# Altium PCB MCU_Board.PcbDoc (part 1 of 2)
Units mil, origin at the board's own origin, x right, y up, seen from the top; angles counter-clockwise.
Board outline 5411.85 x 3910 mil, 4 copper layers (Top Layer, Second Layer, Third Layer, Fouth Layer), stack 59.526 mil thick; 116 components, 143 nets, 703 pads, 913 vias.
Unrouted connection lines stored in the file: 4.
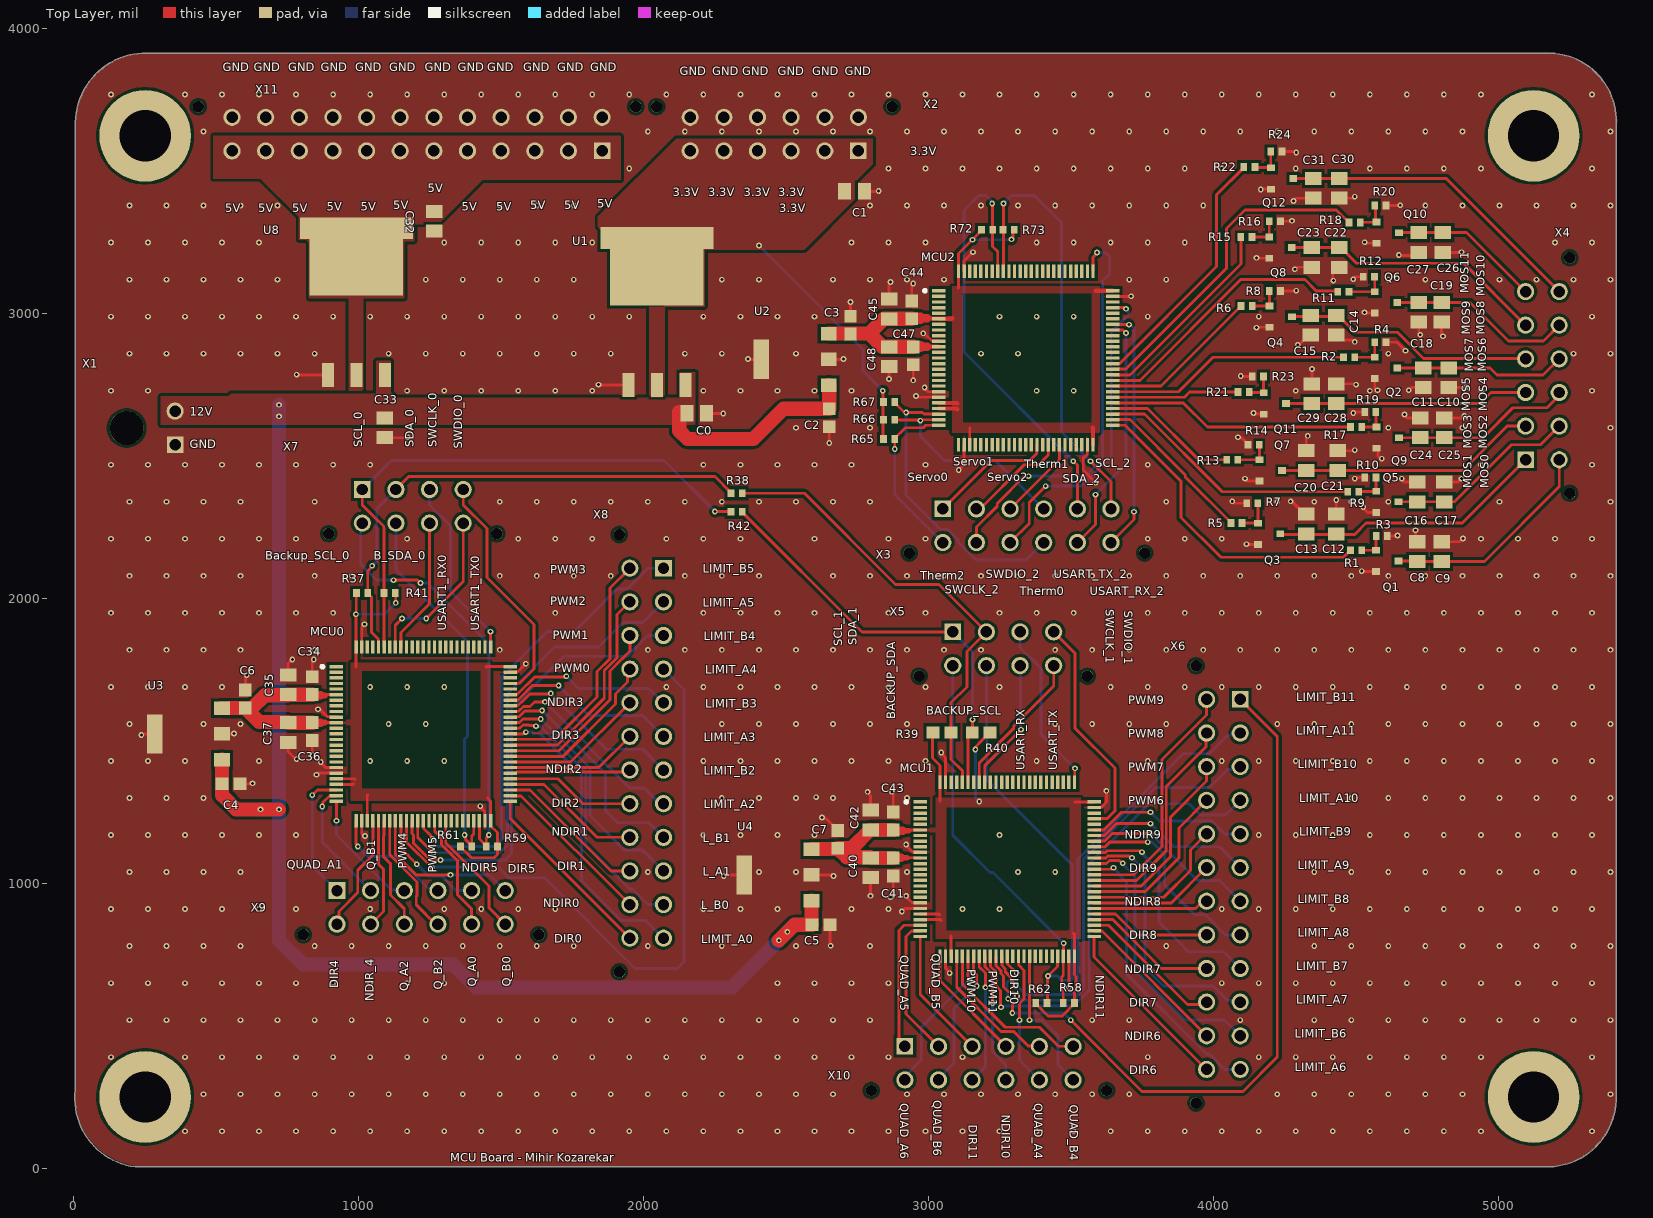
[diagram p0: Top Layer view]
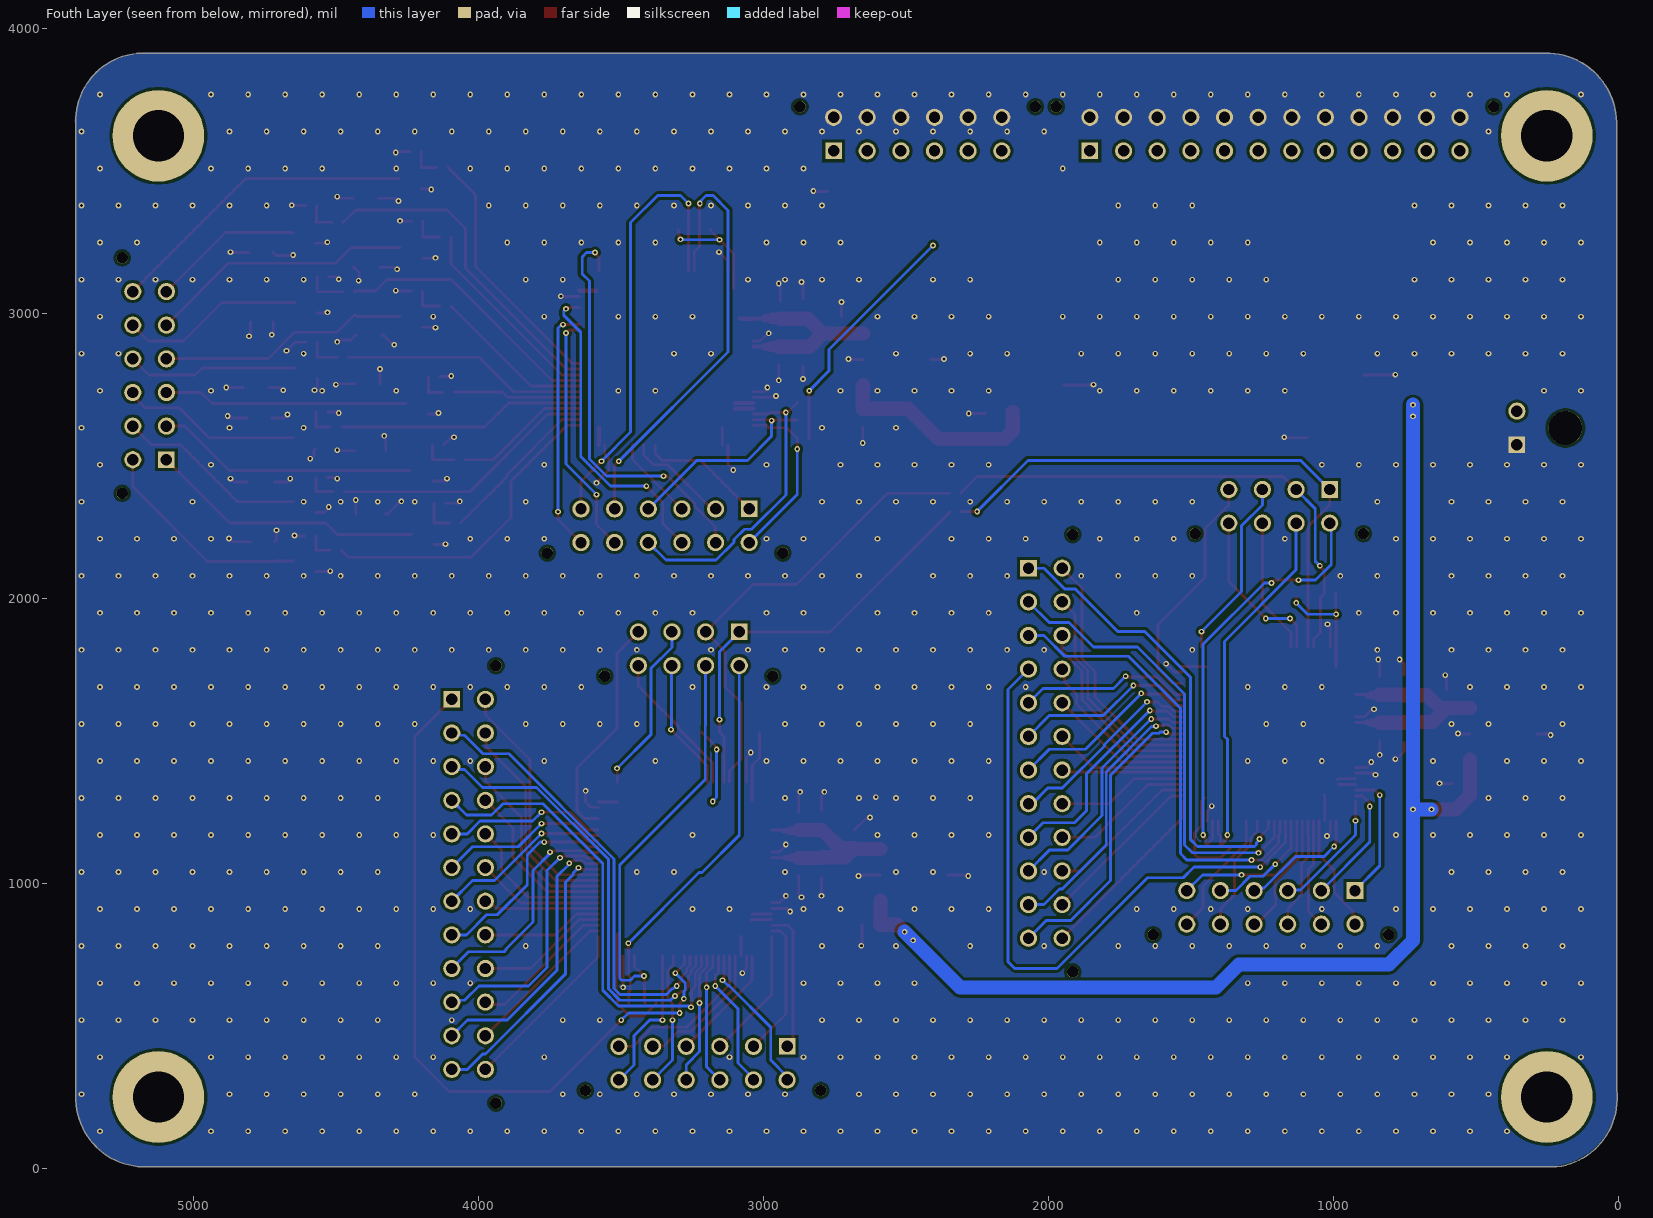
[diagram p1: Fouth Layer view, seen from below]
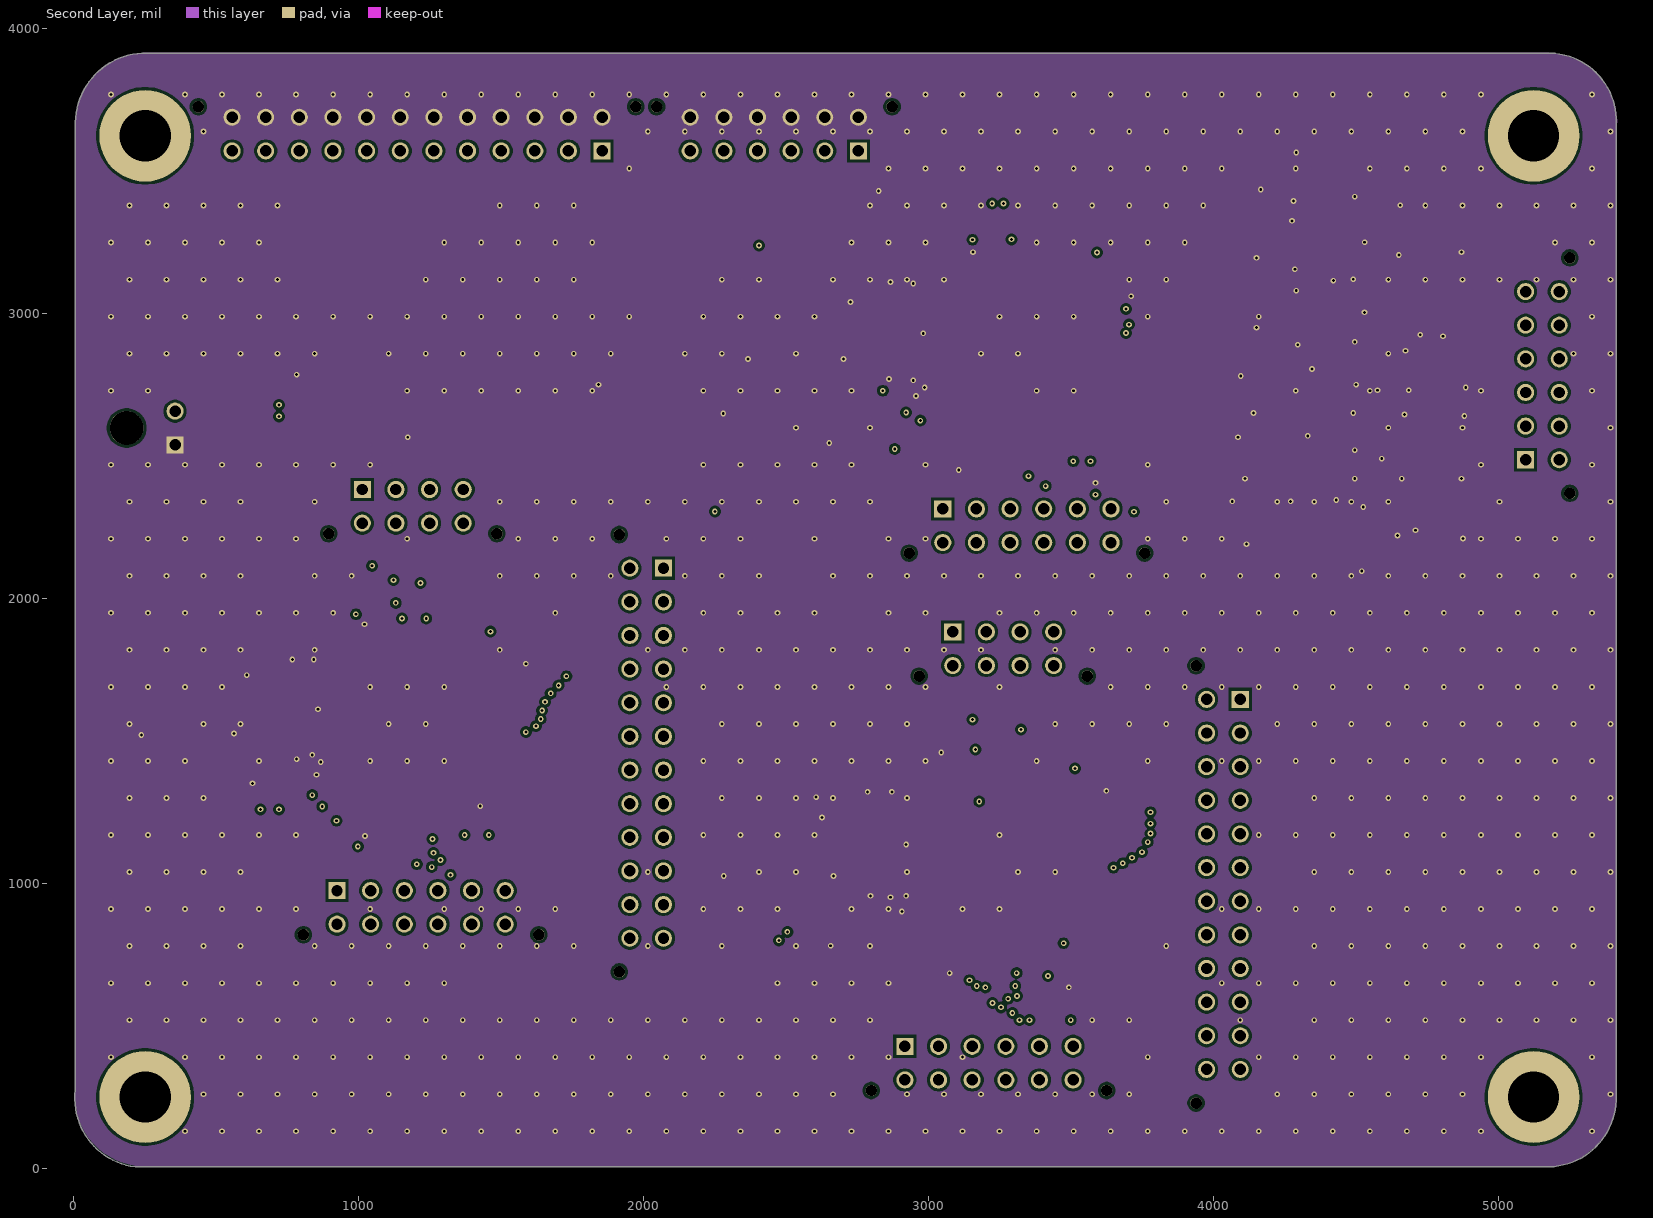
[diagram p2: Second Layer]
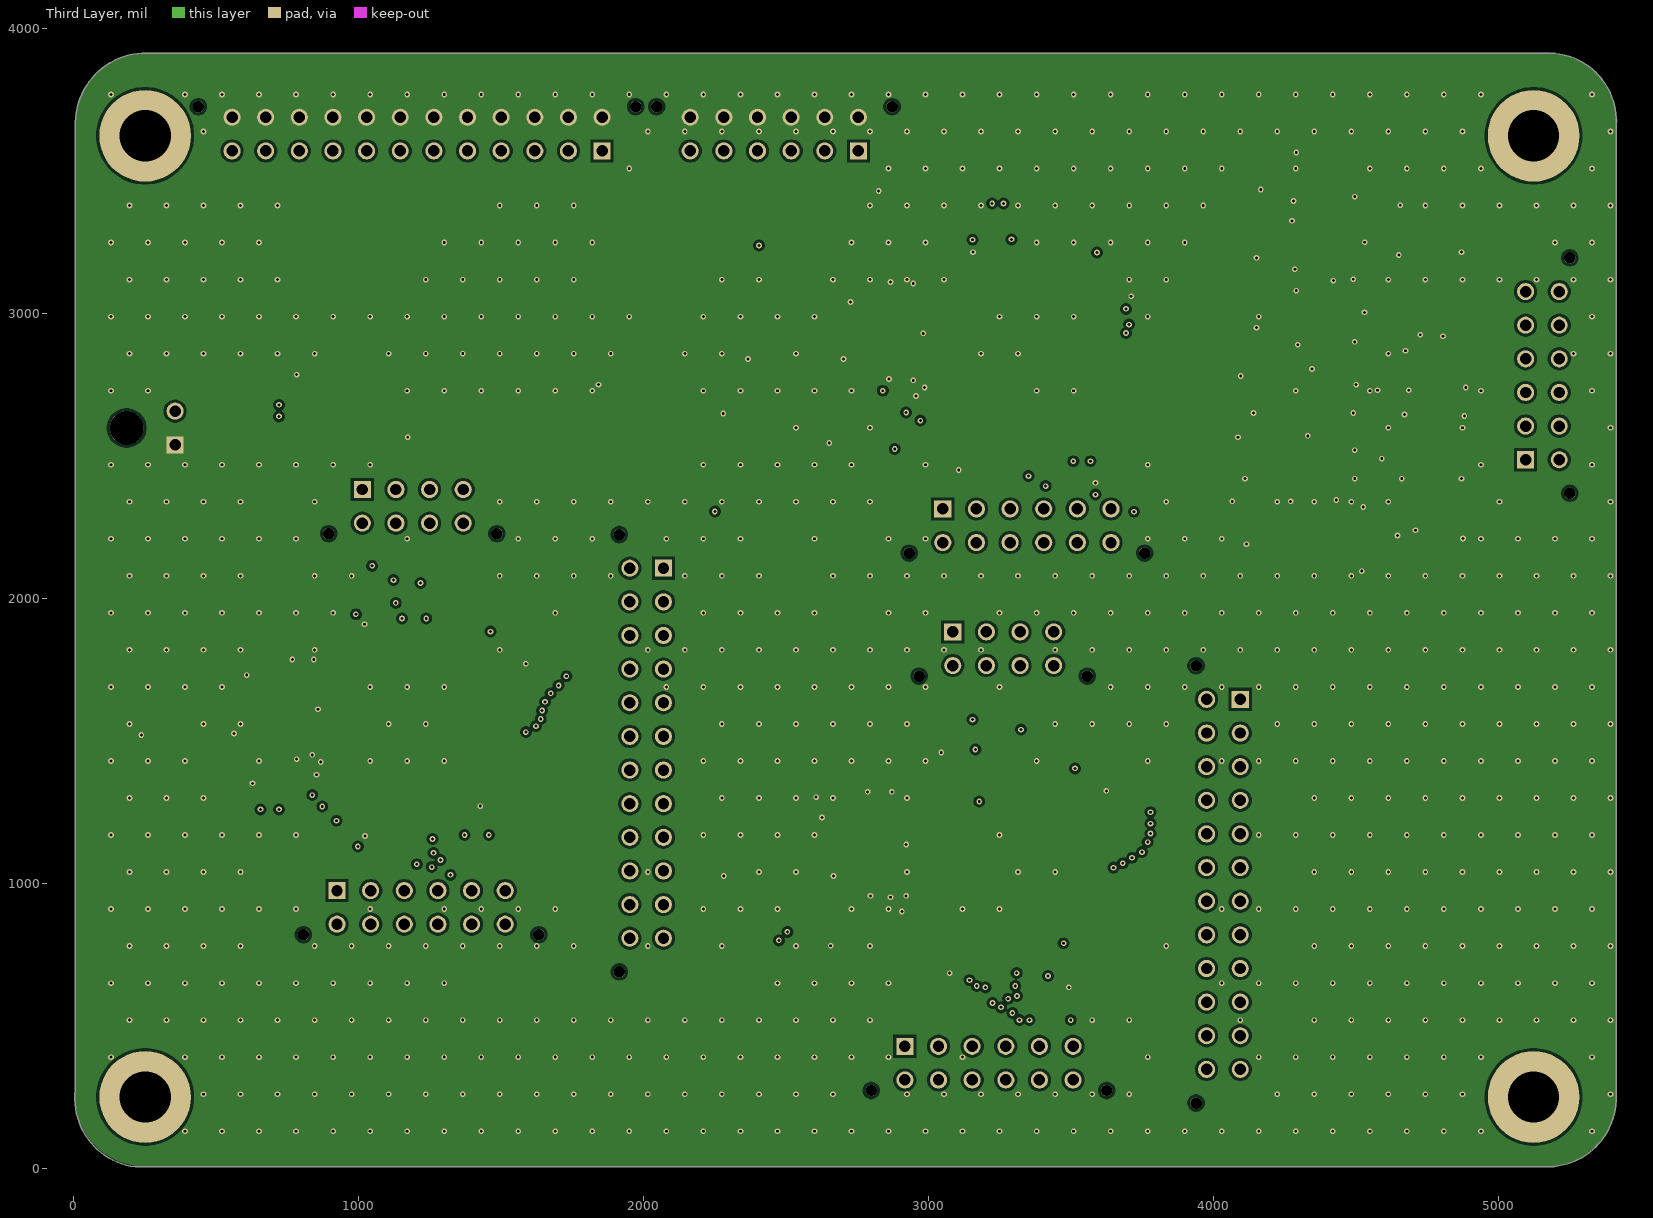
[diagram p3: Third Layer]
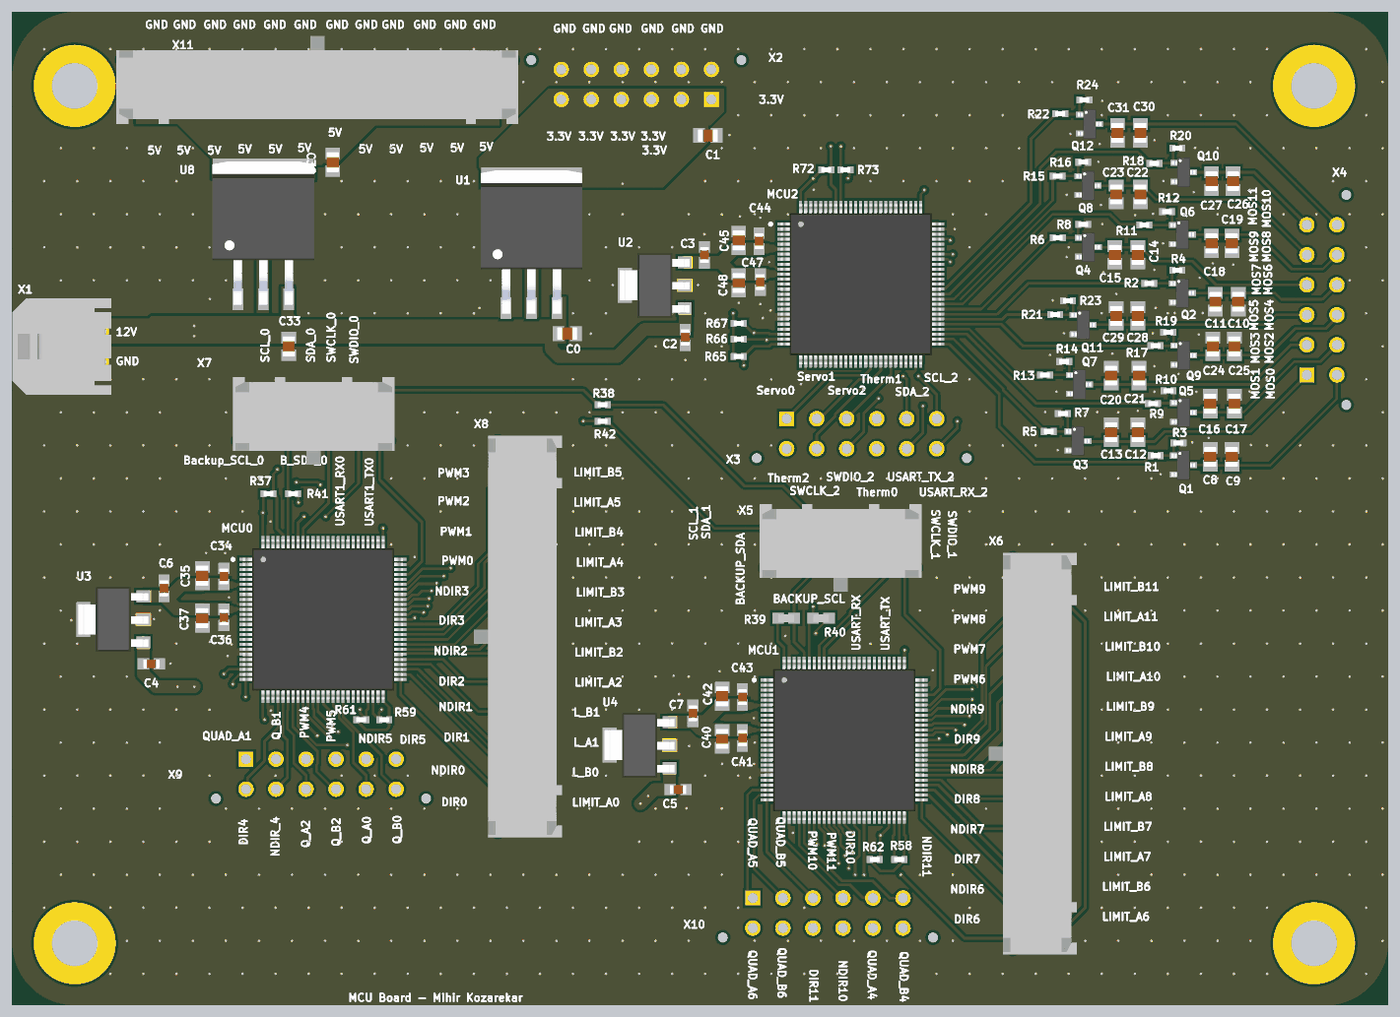
[diagram p5: 3D render of the assembled board from above, using the file's embedded part models]

## Layer stack, top to bottom
Top Solder: solder mask 0.4, Solder Resist, Dk 3.5
Top Layer: signal copper 1.4
Dielectric 2: prepreg 7.3, PP-006, Dk 4.1
Second Layer: signal copper 1.378
Dielectric 1: core 39.37, Core-009, Dk 4.5
Third Layer: signal copper 1.378
Dielectric 3: prepreg 7.3, PP-006, Dk 4.1
Fouth Layer: signal copper 1.4
Bottom Solder: solder mask 0.4, Solder Resist, Dk 3.5

## Board outline
215,5 cw(c245,245) 5,275 5,3655 cw(c252.5,3667.5) 240,3915 5185,3915 cw(c5177.5,3677.5) 5415,3670 5415,3675 5415,255 cw(c5172.5,247.5) 5180,5

## Design rules (kind name [scope] priority, off if disabled: settings)
Clearance [All] p1: gap=10 ignorepadtopadclearanceinfootprint=FALSE except(0: Arc-Hole Track-Hole SMDPad-Hole THPad-Hole Via-Hole Fill-Hole Poly-Hole Region-Hole Text-Hole; 5: Arc-Arc Arc-Track Arc-SMDPad Track-Track Track-SMDPad SMDPad-SMDPad)
HoleSize [All] p1: absolutevalues=TRUE maxlimit=200 minlimit=1 maxpercent=80.000 minpercent=20.000
PlaneClearance [All] p1: clearance=5
PolygonConnect PolygonConnect_1 [All] p1: connectstyle=Direct reliefconductorwidth=10 reliefentries=4 polygonreliefangle="90 Angle" airgapwidth=10
RoutingVias [All] p1: holewidth=28 width=50 viastyle="Through Hole" minholewidth=28 minwidth=50 maxholewidth=28 maxwidth=50
SolderMaskExpansion [IsVia] p1: expansion=4 istentingtop=TRUE
Width [All] p1: maxlimit=100 minlimit=10 preferedwidth=10 midlayer1_maxwidth=10 midlayer2_maxwidth=10 minimp=50.000000 maximp=50.000000 favimp=50.000000
28 further rules are at their usual default settings.

## Classes and differential pairs
component class Voltage_Rails: C0 C1 C2 C3 C4 C5 C6 C7 C32 C33 U1 U2 U3 U4 U8
component class 6_Power_Fuse_MCU: C44 C45 C47 C48 MCU2 R65 R66 R67 R72 R73
component class 5_Motors_MCU: C34 C35 C36 C37 C40 C41 C42 C43 MCU0 MCU1 R37 R38 R39 R40 R41 R42 R58 R59 R61 R62
component class 4_Mosfet: 30 C8 C9 C10 C11 C12 C13 C14 C15 C16 C17 C18 C19 C20 C21 C22 C23 C24 C25 C26 C27 C28 C29 C30 C31 Q1 Q2 Q3 Q4 Q5 Q6 Q7 Q8 Q9 Q10 Q11 Q12 R1 R2 R3 R4 R5 R6 R7 R8 R9 R10 R11 R12 R13 R14 R15 R16 R17 R18 R19 R20 R21 R22 R23 R24 X4
component class 1_Headers: X1 X2 X3 X5 X6 X7 X8 X9 X10 X11

## Components (designator, comment, footprint, x,y, rotation, side; value= is the part's Value field where it differs from the comment)
C0 "CL21A106KOQNNNE" CAP-0805 2187.17,2650 r0 top
C1 "CL21A106KOQNNNE" CAP-0805 2740.35,3430 r0 top
C2 "UMK107AB7105KA-T" CAP-0603 2651.81,2635 r270 top
C3 "CC0603KRX7R0BB104" CAP-0603 2726.81,2960 r90 top
C4 "UMK107AB7105KA-T" CAP-0603 551.81,1350 r0 top
C5 "UMK107AB7105KA-T" CAP-0603 2623.31,855 r0 top
C6 "CC0603KRX7R0BB104" CAP-0603 601.81,1647.05 r90 top
C7 "CC0603KRX7R0BB104" CAP-0603 2681.81,1155 r90 top
C8 "CL21A106KOQNNNE" CAP-0805 4716.81,2165 r90 top
C9 "CL21A106KOQNNNE" CAP-0805 4801.81,2165 r90 top
C10 "CL21A106KOQNNNE" CAP-0805 4826.81,2775.35 r270 top
C11 "CL21A106KOQNNNE" CAP-0805 4736.81,2775.35 r270 top
C12 "CL21A106KOQNNNE" CAP-0805 4431.81,2262.05 r90 top
C13 "CL21A106KOQNNNE" CAP-0805 4326.81,2262.05 r90 top
C14 "CL21A106KOQNNNE" CAP-0805 4431.81,2960 r270 top
C15 "CL21A106KOQNNNE" CAP-0805 4341.81,2960 r270 top
C16 "CL21A106KOQNNNE" CAP-0805 4716.81,2374.65 r90 top
C17 "CL21A106KOQNNNE" CAP-0805 4811.81,2374.65 r90 top
C18 "CL21A106KOQNNNE" CAP-0805 4721.81,3005.35 r270 top
C19 "CL21A106KOQNNNE" CAP-0805 4801.81,3005.35 r270 top
C20 "CL21A106KOQNNNE" CAP-0805 4326.81,2484.65 r90 top
C21 "CL21A106KOQNNNE" CAP-0805 4436.81,2484.65 r90 top
C22 "CL21A106KOQNNNE" CAP-0805 4441.81,3197.95 r270 top
C23 "CL21A106KOQNNNE" CAP-0805 4346.81,3197.95 r270 top
C24 "CL21A106KOQNNNE" CAP-0805 4726.81,2599.65 r90 top
C25 "CL21A106KOQNNNE" CAP-0805 4811.81,2599.65 r90 top
C26 "CL21A106KOQNNNE" CAP-0805 4806.81,3250 r270 top
C27 "CL21A106KOQNNNE" CAP-0805 4721.81,3250 r270 top
C28 "CL21A106KOQNNNE" CAP-0805 4431.81,2719.65 r90 top
C29 "CL21A106KOQNNNE" CAP-0805 4346.81,2719.65 r90 top
C30 "CL21A106KOQNNNE" CAP-0805 4441.81,3440.35 r270 top
C31 "CL21A106KOQNNNE" CAP-0805 4351.81,3440.35 r270 top
C32 "CL21A106KOQNNNE" CAP-0805 1265,3324.65 r270 top
C33 "CL21A106KOQNNNE" CAP-0805 1091.81,2599.65 r270 top
C34 "CC0603KRX7R0BB103" CAP-0603 836.81,1694.29 r90 top
C35 "GCM21BR71H105KA03L" CAP-0805 751.81,1697.44 r90 top
C36 "CC0603KRX7R0BB103" CAP-0603 836.81,1532.87 r270 top
C37 "GCM21BR71H105KA03L" CAP-0805 751.81,1530 r270 top
C40 "GCM21BR71H105KA03L" CAP-0805 2796.81,1054.72 r270 top
C41 "CC0603KRX7R0BB103" CAP-0603 2876.81,1057.87 r270 top
C42 "GCM21BR71H105KA03L" CAP-0805 2796.81,1222.44 r90 top
C43 "CC0603KRX7R0BB103" CAP-0603 2876.81,1219.29 r90 top
C44 "CC0603KRX7R0BB103" CAP-0603 2941.81,3013.98 r90 top
C45 "GCM21BR71H105KA03L" CAP-0805 2861.81,3017.13 r90 top
C47 "CC0603KRX7R0BB103" CAP-0603 2946.81,2852.56 r270 top
C48 "GCM21BR71H105KA03L" CAP-0805 2861.81,2849.41 r270 top
MCU0 "STM32F100VBT7B" IC-STM32F100-0001 1226.81,1525 r270 top
MCU1 "STM32F100VBT7B" IC-STM32F100-0001 3276.81,1050 r270 top
MCU2 "STM32F100VBT7B" IC-STM32F100-0001 3341.93,2844.68 r270 top
Q1 "SSM3K341R,LF" NMOS-SOT23-3 4611.18,2132.4 r270 top
Q2 "SSM3K341R,LF" NMOS-SOT23-3 4606.81,2810 r270 top
Q3 "SSM3K341R,LF" NMOS-SOT23-3 4196.18,2227.4 r270 top
Q4 "SSM3K341R,LF" NMOS-SOT23-3 4236.81,2990 r270 top
Q5 "SSM3K341R,LF" NMOS-SOT23-3 4611.81,2340 r270 top
Q6 "SSM3K341R,LF" NMOS-SOT23-3 4606.81,3040 r270 top
Q7 "SSM3K341R,LF" NMOS-SOT23-3 4201.81,2450 r270 top
Q8 "SSM3K341R,LF" NMOS-SOT23-3 4236.18,3232.6 r270 top
Q9 "SSM3K341R,LF" NMOS-SOT23-3 4612.44,2565 r270 top
Q10 "SSM3K341R,LF" NMOS-SOT23-3 4612.44,3285 r270 top
Q11 "SSM3K341R,LF" NMOS-SOT23-3 4216.81,2685 r270 top
Q12 "SSM3K341R,LF" NMOS-SOT23-3 4241.81,3475 r270 top
R1 "ERJ2RKF33R0X" RES-0402 4501.81,2170 r0 top
R2 "ERJ2RKF33R0X" RES-0402 4477.13,2847.4 r0 top
R3 "ERJ2GEJ103X" RES-0402 4591.81,2220 r0 top
R4 "ERJ2GEJ103X" RES-0402 4586.81,2900 r0 top
R5 "ERJ2RKF33R0X" RES-0402 4081.81,2265 r0 top
R6 "ERJ2RKF33R0X" RES-0402 4117.13,3027.4 r0 top
R7 "ERJ2GEJ103X" RES-0402 4137.13,2335 r180 top
R8 "ERJ2GEJ103X" RES-0402 4216.81,3080 r0 top
R9 "ERJ2RKF33R0X" RES-0402 4491.81,2375 r0 top
R10 "ERJ2GEJ103X" RES-0402 4552.13,2425 r180 top
R11 "ERJ2RKF33R0X" RES-0402 4457.13,3077.4 r0 top
R12 "ERJ2GEJ103X" RES-0402 4546.81,3130 r180 top
R13 "ERJ2RKF33R0X" RES-0402 4066.81,2487.4 r0 top
R14 "ERJ2GEJ103X" RES-0402 4142.13,2540 r180 top
R15 "ERJ2RKF33R0X" RES-0402 4116.81,3270 r0 top
R16 "ERJ2GEJ103X" RES-0402 4216.81,3325 r0 top
R17 "ERJ2RKF33R0X" RES-0402 4501.5,2602.4 r0 top
R18 "ERJ2RKF33R0X" RES-0402 4496.81,3320 r0 top
R19 "ERJ2GEJ103X" RES-0402 4551.5,2655 r180 top
R20 "ERJ2GEJ103X" RES-0402 4586.81,3380 r0 top
R21 "ERJ2RKF33R0X" RES-0402 4106.81,2725 r0 top
R22 "ERJ2RKF33R0X" RES-0402 4126.81,3515 r0 top
R23 "ERJ2GEJ103X" RES-0402 4156.81,2780 r180 top
R24 "ERJ2GEJ103X" RES-0402 4221.81,3570 r0 top
R37 "RC0402FR-7W4K7L" RES-0402 1011.81,2020 r0 top
R38 "RC0402FR-070RL" RES-0402 2326.81,2370 r0 top
R39 "AF0603FR-074K7L" RES-0603 3048.31,1530 r0 top
R40 "AF0603FR-074K7L" RES-0603 3185.51,1530 r0 top
R41 "RC0402FR-7W4K7L" RES-0402 1108.7,2020 r180 top
R42 "RC0402FR-070RL" RES-0402 2326.81,2305 r0 top
R58 "RC0402FR-7W4K7L" RES-0402 3493.35,580 r0 top
R59 "RC0402FR-7W4K7L" RES-0402 1467.13,1130 r0 top
R61 "RC0402FR-7W4K7L" RES-0402 1377.13,1130 r0 top
R62 "RC0402FR-7W4K7L" RES-0402 3396.81,580 r0 top
R65 "ERJ2GEJ103X" RES-0402 2861.81,2560 r180 top
R66 "ERJ2GEJ103X" RES-0402 2862.13,2628.15 r180 top
R67 "ERJ2GEJ103X" RES-0402 2861.81,2690 r180 top
R72 "RC0402FR-7W4K7L" RES-0402 3206.5,3295 r0 top
R73 "RC0402FR-7W4K7L" RES-0402 3281.81,3295 r0 top
U1 "LM1084IS-3.3/NOPB" DDPAK/TO-263-3 2046.81,3128.94 r270 top
U2 "UA78M33CDCYR" SOT-223-4 2531.81,2840 r180 top
U3 "UA78M33CDCYR" SOT-223-4 401.81,1525 r180 top
U4 "UA78M33CDCYR" SOT-223-4 2471.81,1030 r180 top
U8 "LM1084IS-5.0/NOPB" DDPAK/TO-263-3 991.81,3163.94 r270 top
X1 "Molex 43650-0200" 43650-0200 185,2599.06 r270 top
X2 "Molex - Micro-Fit 3.0 Series connector,  3.00mm (0.118\") pitch header, 12 positions." 43045-1212 2459.06,3571.89 r0 top
X3 "Molex - Micro-Fit 3.0 Series connector,  3.00mm (0.118\") pitch header, 12 positions." 43045-1212 3345.87,2315 r180 top
X4 "Molex - Micro-Fit 3.0 Series connector,  3.00mm (0.118\") pitch header, 12 positions." 43045-1212 5096.81,2782.83 r270 top
X5 "Molex 43045-0812" 43045-0812 3262.75,1883.11 r180 top
X6 "Molex 43045-2412" 43045-2412 4094.92,996.61 r90 top
X7 "Molex 43045-0812" 43045-0812 1189.64,2383.11 r180 top
X8 "Molex 43045-2412" 43045-2412 2069.92,1457.17 r90 top
X9 "Molex - Micro-Fit 3.0 Series connector,  3.00mm (0.118\") pitch header, 12 positions." 43045-1212 1218.98,975 r180 top
X10 "Molex - Micro-Fit 3.0 Series connector,  3.00mm (0.118\") pitch header, 12 positions." 43045-1212 3212.75,428.11 r180 top
X11 "Molex 43045-2412" 43045-2412 1204.72,3571.89 r0 top

## Footprints (in the part's own frame and the unit in brackets; to place one, negate y for a bottom-side part, rotate by r counter-clockwise, add the part's x,y. Pads: shape width x height; smd on the part's side, far side on the other; paste and mask are expansions set on the pad)
43045-0812 [mm]
  round 1.02 hole 1.02 unplated: 1(-7.5,3.94) 1(7.5,3.94)
  rect 1.482x1.482 / inner rect 1.524x1.524 / far side rect 1.482x1.482 hole 1.02: P$1(4.5,0)
  round 1.53 / inner round 1.524 / far side round 1.53 hole 1.02: P$2(1.5,0) P$3(-1.5,0) P$4(-4.5,0) P$5(4.5,3) P$6(1.5,3) P$7(-1.5,3) P$8(-4.5,3)
  body extent -8.07,-2.45 8.08,6.32, height 10.03
43045-1212 [mm]
  round 1.02 hole 1.02 unplated: 1(-10.5,3.94) 1(10.5,3.94)
  rect 1.482x1.482 / inner rect 1.524x1.524 / far side rect 1.482x1.482 hole 1.02: P$1(7.5,0)
  round 1.53 / inner round 1.524 / far side round 1.53 hole 1.02: P$2(4.5,0) P$3(1.5,0) P$4(-1.5,0) P$5(-4.5,0) P$6(-7.5,0) P$7(7.5,3) P$8(4.5,3) P$9(1.5,3) P$10(-1.5,3) P$11(-4.5,3) P$12(-7.5,3)
43045-2412 [mm]
  round 1.02 hole 1.02 unplated: 1(-19.5,3.94) 1(19.5,3.94)
  rect 1.482x1.482 / inner rect 1.524x1.524 / far side rect 1.482x1.482 hole 1.02: P$1(16.5,0)
  round 1.53 / inner round 1.524 / far side round 1.53 hole 1.02: P$2(13.5,0) P$3(10.5,0) P$4(7.5,0) P$5(4.5,0) P$6(1.5,0) P$7(-1.5,0) P$8(-4.5,0) P$9(-7.5,0) P$10(-10.5,0) P$11(-13.5,0) P$12(-16.5,0) P$13(16.5,3) P$14(13.5,3) P$15(10.5,3) P$16(7.5,3) P$17(4.5,3) P$18(1.5,3) P$19(-1.5,3) P$20(-4.5,3) P$21(-7.5,3) P$22(-10.5,3) P$23(-13.5,3) P$24(-16.5,3)
  body extent -20.07,-2.45 20.08,6.32, height 10.03
43650-0200 [mm]
  round 3 hole 3 unplated: 1(0,0)
  rect 1.482x1.482 / inner rect 1.524x1.524 / far side rect 1.482x1.482 hole 1.02: P$1(1.5,4.32)
  round 1.53 / inner round 1.524 / far side round 1.53 hole 1.02: P$2(-1.5,4.32)
  body extent -4.82,-4.57 4.83,5.33, height 5.68
CAP-0603 [mm]
  rect 1.15x1.1 smd: 1(-0.8,0) 2(0.8,0)
  body extent -0.8,-0.45 0.8,0.45, height 0.8
CAP-0805 [mm]
  rect 1.16x1.47 smd: 1(-0.88,0) 2(0.88,0)
  body extent -1,-0.63 1,0.63, height 0.94
DDPAK/TO-263-3 [mm]
  rect 2.16x1.07 smd: 1(9.625,-2.54) 2(9.625,0) 3(9.625,2.54)
  rect 1.95x10.08 smd: 2(-3.469,0)
  rect 5.08x8.33 smd: 2(0,0)
  body extent -4.18,-5.08 10.18,5.08, height 4.77
IC-STM32F100-0001 [mm] "STM32F100VBT7b"
  rect 0.3x1.2 smd: 1(-6,-7.75) 2(-5.5,-7.75) 3(-5,-7.75) 4(-4.5,-7.75) 5(-4,-7.75) 6(-3.5,-7.75) 7(-3,-7.75) 8(-2.5,-7.75) 9(-2,-7.75) 10(-1.5,-7.75) 11(-1,-7.75) 12(-0.5,-7.75) 13(0,-7.75) 14(0.5,-7.75) 15(1,-7.75) 16(1.5,-7.75) 17(2,-7.75) 18(2.5,-7.75) 19(3,-7.75) 20(3.5,-7.75) 21(4,-7.75) 22(4.5,-7.75) 23(5,-7.75) 24(5.5,-7.75) 25(6,-7.75) 51(6,7.75) 52(5.5,7.75) 53(5,7.75) 54(4.5,7.75) 55(4,7.75) 56(3.5,7.75) 57(3,7.75) 58(2.5,7.75) 59(2,7.75) 60(1.5,7.75) 61(1,7.75) 62(0.5,7.75) 63(0,7.75) 64(-0.5,7.75) 65(-1,7.75) 66(-1.5,7.75) 67(-2,7.75) 68(-2.5,7.75) 69(-3,7.75) 70(-3.5,7.75) 71(-4,7.75) 72(-4.5,7.75) 73(-5,7.75) 74(-5.5,7.75) 75(-6,7.75)
  rect 1.2x0.3 smd: 26(7.75,-6) 27(7.75,-5.5) 28(7.75,-5) 29(7.75,-4.5) 30(7.75,-4) 31(7.75,-3.5) 32(7.75,-3) 33(7.75,-2.5) 34(7.75,-2) 35(7.75,-1.5) 36(7.75,-1) 37(7.75,-0.5) 38(7.75,0) 39(7.75,0.5) 40(7.75,1) 41(7.75,1.5) 42(7.75,2) 43(7.75,2.5) 44(7.75,3) 45(7.75,3.5) 46(7.75,4) 47(7.75,4.5) 48(7.75,5) 49(7.75,5.5) 50(7.75,6) 76(-7.75,6) 77(-7.75,5.5) 78(-7.75,5) 79(-7.75,4.5) 80(-7.75,4) 81(-7.75,3.5) 82(-7.75,3) 83(-7.75,2.5) 84(-7.75,2) 85(-7.75,1.5) 86(-7.75,1) 87(-7.75,0.5) 88(-7.75,0) 89(-7.75,-0.5) 90(-7.75,-1) 91(-7.75,-1.5) 92(-7.75,-2) 93(-7.75,-2.5) 94(-7.75,-3) 95(-7.75,-3.5) 96(-7.75,-4) 97(-7.75,-4.5) 98(-7.75,-5) 99(-7.75,-5.5) 100(-7.75,-6)
  silkscreen extent -6.13,-9.13 -5.87,-8.87, body extent -8,-8 8,8, height 1.6
NMOS-SOT23-3 [mm]
  rect 0.6x0.7 smd: 1(-0.95,-1) 2(0.95,-1) 3(0,1)
  body extent -1.46,-1.18 1.46,1.19, height 1.12
RES-0402 [mm]
  rect 0.6x0.7 smd: 1(-0.5,0) 2(0.5,0)
  body extent -0.5,-0.25 0.5,0.25, height 0.3
RES-0603 [mm]
  rect 1.15x1.1 smd: 1(-0.8,0) 2(0.8,0)
  body extent -0.8,-0.4 0.8,0.4, height 0.43
SOT-223-4 [mm]
  rect 1.4x1.2 smd mask+0.07: 1(-3,2.3) 2(-3,0) 3(-3,-2.3)
  rect 1.4x3.5 smd: 2(3,0)
  body extent -3.5,-3.25 3.5,3.25, height 1.68

## Part data
C0 C1 C8 C9 C10 C11 C12 C13 C14 C15 C16 C17 C18 C19 C20 C21 C22 C23 C24 C25 C26 C27 C28 C29 C30 C31 C32 C33: library part CAP-10U-0002, "10 µF ±10% 16V Ceramic Capacitor X7R 0805 (2012 Metric)", Capacitance="10 uF", Package Size=0805, Voltage Rating=16V
C2 C4 C5: library part CAP-1U-0002, "1 µF ±10% 50V Ceramic Capacitor X7R 0603 (1608 Metric)", Capacitance="1 uF", Package Size=0603, Voltage=50V
C3 C6 C7: library part CAP-100N-0002-JLC, "100V 100nF X7R ±10% 0603 Multilayer Ceramic Capacitors MLCC - SMD/SMT ROHS", Capacitance="100 nF +/- 10%", JLC Part Number=C113803, Voltage=100V, assembled?=yes
C34 C36 C41 C43 C44 C47: library part CAP-10N-0003-JLC, "100V 10nF X7R ±10% 0603 Multilayer Ceramic Capacitors MLCC - SMD/SMT ROHS", Capacitance="10nF +/-10%", JLC Part Number=C107059, Manufacturer=Yageo, Package Size=0603, Temperature Coefficient=X7R, Voltage Rating=100V, assembled?=yes, Manufacturer Part Number=CC0603KRX7R0BB103
C35 C37 C40 C42 C45 C48: library part CAP-1U-0003-JLC, "50V 1uF X7R ±10% 0805 Multilayer Ceramic Capacitors MLCC - SMD/SMT ROHS", JLC Part Number=C126592, Voltage=50V, assembled?=yes, Cap="1 uF +/- 10%"
MCU0 MCU1 MCU2: library part IC-STM32F100-0001, "ARM® Cortex®-M3 STM32F1 Microcontroller IC 32-Bit Single-Core 24MHz 128KB (128K x 8) FLASH 100-LQFP (14x14)", Package Size=100-LQFP, Manufacturer Part Number=STM32F100VBT7B, VCC="2 ~ 3.6V"
Q1 Q2 Q3 Q4 Q5 Q6 Q7 Q8 Q9 Q10 Q11 Q12: library part NMOS-5A-0001, "N-Channel 60 V 6A (Ta) 1.2W (Ta) Surface Mount SOT-23F", Package=SOT-23-3, Id=6A, RdsOn=36mOhm, Vdss=60V, Vgs=2.5V
R1 R2 R5 R6 R9 R11 R13 R15 R17 R18 R21 R22: library part RES-33-0003-JLC, "100mW Thick Film Resistors ±100ppm/℃ ±1% -55℃~+155℃ 33Ω 0402  Chip Resistor - Surface Mount ROHS", JLC Part Number=C278594, Power="1/10 W", Resistance="33 Ohm +/- 1%", assembled?=yes
R3 R4 R7 R8 R10 R12 R14 R16 R19 R20 R23 R24 R65 R66 R67: library part RES-10K-0003-JLC, "100mW Thick Film Resistors 100V ±5% ±200ppm/℃ -55℃~+155℃ 10kΩ 0402  Chip Resistor - Surface Mount ROHS", JLC Part Number=C278577, Power="1/10 W", Resistance="10K Ohm +/- 5%", assembled?=yes
R37 R41 R58 R59 R61 R62 R72 R73: library part RES-4.7K-0003-JLC, "125mW Thick Film Resistors 50V ±1% ±200ppm/℃ -55℃~+155℃ 4.7kΩ 0402  Chip Resistor - Surface Mount ROHS", JLC Part Number=C606173, Power="1/8 W", Resistance="4.7k Ohm +/- 1%", assembled?=yes
R38 R42: library part RES-0-0002-JLC, "62.5mW Thick Film Resistors 50V -55℃~+155℃ 0Ω 0402 Chip Resistor - Surface Mount ROHS", JLC Part Number=C106231, Power="62.5 mW", Resistance="0 Ohm", assembled?=yes
R39 R40: library part RES-4.7K-0002, "RES SMD 4.7K OHM 1% 1/10W 0603", Manufacturer=YAGEO, Package Size=0603, Power Rating=1/10W, Resistance="4.7kOhm +/-1%", assembled?=no, Manufacturer Part Number=AF0603FR-074K7L
U1: library part LDO-3.3V-0001, "Linear Voltage Regulator IC Positive Fixed 1 Output 5A DDPAK/TO-263-3", Current=5A, Package=DDPAK/TO-263-3, Vin (max)=27V, Vout (fixed)=3.3V
U2 U3 U4: library part LDO-3.3V-0002, "Linear Voltage Regulator IC Positive Fixed 1 Output 500mA SOT-223-4", Current="500 mA", Package=SOT-223-4, Vin=25V, Vout=3.3V
U8: library part LDO-5V-0001, "Linear Voltage Regulator IC Positive Fixed 1 Output 5A DDPAK/TO-263-3", Current=5A, Package=DDPAK/TO-263-3, Vin=25V, Vout=5V
X1: library part "Micro-Fit Molex 2 Pin Right Angle", Package=43650-0200, DeviceName=43650-0200, DeviceSetName=HEADER_POS2_?, GateName_1=G$1, LibraryName=con-molex-micro-fit-3_0_2, SymbolName_1=HEADER_POS2
X2 X3 X4 X9 X10: library part HEADER_POS12_?43045-1212, Package=43045-1212, DeviceName=43045-1212, DeviceSetName=HEADER_POS12_?, GateName_1=G$1, LibraryName=con-molex-micro-fit-3_0_2, SymbolName_1=HEADER_POS12
X5 X7: library part "Micro-Fit Molex 8 Pin 2 Row Vertical", Package=43045-0812, DeviceName=43045-0812, DeviceSetName=HEADER_POS8_?, GateName_1=G$1, LibraryName=con-molex-micro-fit-3_0_2, SymbolName_1=HEADER_POS8
X6 X8 X11: library part "Micro-Fit Molex 24 Pin Vertical", Package=43045-2412, DeviceName=43045-2412, DeviceSetName=HEADER_POS24_?, GateName_1=G$1, LibraryName=con-molex-micro-fit-3_0_2, SymbolName_1=HEADER_POS24

## Free pads (board coordinates)
  round 322 hole 180: ""(250,250) ""(250,3625) ""(5125,250) ""(5125,3625)

## Via types
v1: diameter 20, hole 10, Top Layer to Fouth Layer, tented both sides, 913 vias

## Nets (pads, with @x,y where several pads share a name; then routed paths per layer and width w, separated by ;. In a path a pad name is that pad's centre, name@x,y a point inside that pad or via, vN(x,y) a via of type N, cw(c..) or ccw(c..) an arc to the next point about the centre after c; other vN are vias at no path point)
3.3V: C6.1 C34.1 C35.1 C36.1 C37.1 MCU0.6 MCU0.11 MCU0.21 MCU0.22 MCU0.28 MCU0.50 MCU0.75 MCU0.100 R37.1 R41.1 R59.2 R61.1 U3.3 | length 1871.9
  Top Layer w10: 881.81,1565 921.06,1565 MCU0.11@921.69,1564.37 ; 881.81,1660 884.61,1662.8 MCU0.6@921.69,1662.8 ; MCU0.22@921.69,1347.83 979.65,1347.83 981.81,1350 ; MCU0.21@921.69,1367.52 984.29,1367.52 986.81,1365 ; 990,1760 990.59,1760.59 MCU0.100@990.59,1830.12 990.59,1944.41 v1(990,1945) 991.06,1946.06 991.06,2018.94 R37.1@992.13,2020 ; MCU0.28@1029.96,1219.88 1029.96,1308.15 1031.81,1310 ; v1(1130,1985) 1130,2005 ; R61.1@1357.44,1130 1357.44,1128.03 1395.47,1090 1475,1090 1486.81,1101.81 R59.2@1486.81,1130 1486.81,1178.39 1463.03,1202.17 MCU0.50@1463.03,1219.88 1463.03,1288.78 1451.81,1300 ; 1446.81,1760 1448.03,1761.22 MCU0.75@1531.93,1761.22
  Top Layer w20: 865.73,1563.92 880.73,1563.92 881.81,1565 ; 866.81,1660 881.81,1660
  Top Layer w30: C36.1@836.81,1564.37 837.27,1563.92 865.73,1563.92 ; C34.1@836.81,1662.8 839.61,1660 866.81,1660
  Top Layer w50: U3.3@519.92,1615.55 C6.1@601.81,1615.55 ; C36.1@836.81,1564.37 752.09,1564.37 C37.1@751.81,1564.65 749.65,1566.81 650.55,1566.81 C6.1@601.81,1615.55 ; C34.1@836.81,1662.8 C35.1@751.81,1662.8 749.65,1660.63 670.62,1660.63 625.54,1615.55 C6.1@601.81,1615.55
  Fouth Layer w10: v1(990,1945) 1090,1945 v1(1130,1985)
3.3V_Main: C1.1 R65.2 R66.2 R67.2 U1.2 X2.P$1 X2.P$2 X2.P$3 X2.P$4 X2.P$5 X2.P$6 | length 861.1
  Top Layer w10: v1(2840,2730) 2841.06,2728.94 2841.06,2561.06 R65.2@2842.13,2560
  Fouth Layer w10: v1(2405,3240) 2770,2875 2770,2800 v1(2840,2730)
3.3V_MCU_1: C7.1 C40.1 C41.1 C42.1 C43.1 MCU1.6 MCU1.11 MCU1.21 MCU1.22 MCU1.28 MCU1.50 MCU1.75 MCU1.100 R39.1 R40.2 R58.2 R62.1 U4.3 | length 1945.5
  Top Layer w10: 2925,1090 2971.06,1090 MCU1.11@2971.69,1089.37 ; 2930,1185 2932.8,1187.8 MCU1.6@2971.69,1187.8 ; MCU1.22@2971.69,872.83 3042.17,872.83 3045,870 ; MCU1.21@2971.69,892.52 3037.48,892.52 3040,890 ; R39.1@3016.81,1530 3015,1528.19 3015,1440 3040.59,1414.41 MCU1.100@3040.59,1355.12 3040.59,1290.59 3040,1290 ; MCU1.28@3079.96,744.88 3079.96,814.96 3080,815 ; v1(3165,1470) 3166.91,1471.91 3166.91,1480.89 3185,1498.97 3216.02,1530 R40.2@3217.01,1530 ; R62.1@3377.13,580 3377.13,578.03 3420.16,535 3470,535 3513.03,578.03 3513.03,619.33 3518.35,624.64 3518.35,672.79 3513.03,678.11 MCU1.50@3513.03,744.88 3513.03,821.97 3510,825 ; 3515,1285 3516.22,1286.22 MCU1.75@3581.93,1286.22
  Top Layer w20: 2905,1090 2925,1090 ; 2910,1185 2930,1185
  Top Layer w30: C41.1@2876.81,1089.37 2877.44,1090 2905,1090 ; C43.1@2876.81,1187.8 2879.61,1185 2910,1185
  Top Layer w50: U4.3@2589.92,1120.55 2678.86,1120.55 C7.1@2681.81,1123.5 ; C41.1@2876.81,1089.37 C40.1@2796.81,1089.37 2794.65,1091.54 2713.78,1091.54 C7.1@2681.81,1123.5 ; C43.1@2876.81,1187.8 C42.1@2796.81,1187.8 2795.04,1187.8 2730.75,1123.5 C7.1@2681.81,1123.5
  Fouth Layer w10: v1(3165,1470) 3165,1301.42 v1(3178.55,1287.88)
3.3V_PDB: C3.1 C44.1 C45.1 C47.1 C48.1 MCU2.6 MCU2.11 MCU2.21 MCU2.22 MCU2.28 MCU2.50 MCU2.75 MCU2.100 R72.1 R73.2 U2.3 | length 1445.5
  Top Layer w10: 3105,3090 3105.71,3090.71 MCU2.100@3105.71,3149.8 3105.71,3211.93 3186.81,3293.03 R72.1@3186.81,3295 ; 3145,2600 3145.08,2599.92 MCU2.28@3145.08,2539.57 ; v1(3291.79,3261.37) 3291.79,3264.08 3297.47,3269.75 3297.47,3290.97 R73.2@3301.5,3295
  Top Layer w15: 2996.17,2985 3006.77,2985 3008.01,2983.76 MCU2.6@3035.53,2983.76 ; 2996.81,2885 MCU2.11@3035.87,2885 ; MCU2.22@3036.81,2667.52 3099.29,2667.52 3101.81,2665 ; MCU2.21@3036.81,2687.2 3099.61,2687.2 3101.81,2685 ; MCU2.6@3036.81,2982.48 3082.29,2982.48 3083.81,2984 ; 3576.81,2600 3578.15,2598.66 MCU2.50@3578.15,2539.57 ; 3586.81,3080 3587.72,3080.91 MCU2.75@3647.05,3080.91
  Top Layer w30: 2971.81,2885 2996.81,2885 ; 2971.81,2985 2996.17,2985
  Top Layer w40: C44.1@2941.81,2982.48 2941.81,2983.35 2943.47,2985 2971.81,2985 ; C47.1@2946.81,2884.06 2947.76,2885 2971.81,2885
  Top Layer w50: U2.3@2649.92,2930.55 2792.36,2930.55 ; C44.1@2941.81,2982.48 C45.1@2861.81,2982.48 2844.29,2982.48 2792.36,2930.55 ; C47.1@2946.81,2884.06 C48.1@2861.81,2884.06 2838.86,2884.06 2792.36,2930.55
  Fouth Layer w10: v1(3155,3260) v1@3290,3260
5V_Main: C32.1 U8.2 X11.P$1 X11.P$2 X11.P$3 X11.P$4 X11.P$5 X11.P$6 X11.P$7 X11.P$8 X11.P$9 X11.P$10 X11.P$11 X11.P$12
12V_Main: C0.1 C2.1 C4.1 C5.1 C33.1 U1.3 U2.1 U3.1 U4.1 U8.3 X1.P$2 | length 5182.8
  Top Layer w50: U3.1@519.92,1434.45 520,1434.37 520,1310 570,1260 v1(655,1260) v1(720,1260) ; 2125,2655 2125,2589.29 2154.29,2560 2385,2560 2491.5,2666.5 C2.1@2651.81,2666.5 2651.81,2748.07 2650.43,2749.45 U2.1@2649.92,2749.45 ; v1(2475,800) v1(2505,830) 2530,855 C5.1@2591.81,855 2589.92,856.89 U4.1@2589.92,939.45
  Fouth Layer w50: v1(655,1260) v1(720,1260) ; v1(720,2680.3) 720,2605 v1(720,1260) ; v1(2505,830) v1(2475,800) 2309.37,634.37 1411.62,634.37 1330.99,715 805,715 720,800 v1(720,1260)
  other v1: 720,2640
GND: C0.2 C1.2 C2.2 C3.2 C4.2 C5.2 C6.2 C7.2 C8.2 C9.2 C10.2 C11.2 C12.2 C13.2 C14.2 C15.2 C16.2 C17.2 C18.2 C19.2 C20.2 C21.2 C22.2 C23.2 C24.2 C25.2 C26.2 C27.2 C28.2 C29.2 C30.2 C31.2 C32.2 C33.2 C34.2 C35.2 C36.2 C37.2 C40.2 C41.2 C42.2 C43.2 C44.2 C45.2 C47.2 C48.2 MCU0.10 MCU0.19 MCU0.20 MCU0.27 MCU0.49 MCU0.74 MCU0.99 MCU1.10 MCU1.19 MCU1.20 MCU1.27 MCU1.49 MCU1.74 MCU1.99 MCU2.10 MCU2.19 MCU2.20 MCU2.27 MCU2.49 MCU2.74 MCU2.99 Q1.2 Q2.2 Q3.2 Q4.2 Q5.2 Q6.2 Q7.2 Q8.2 Q9.2 Q10.2 Q11.2 Q12.2 R3.2 R4.2 R7.2 R8.2 R10.2 R12.2 R14.2 R16.2 R19.2 R20.2 R23.2 R24.2 U1.1 U2.2 U3.2 U4.2 U8.1 X1.P$1 X2.P$7 X2.P$8 X2.P$9 X2.P$10 X2.P$11 X2.P$12 X11.P$13 X11.P$14 X11.P$15 X11.P$16 X11.P$17 X11.P$18 X11.P$19 X11.P$20 X11.P$21 X11.P$22 X11.P$23 X11.P$24 | length 6101.6
  Top Layer w10: v1@235,1520 240,1525 U3.2@283.7,1525 ; U3.2@519.92,1525 v1@560,1525 ; C4.2@583.31,1350 v1@625,1350 ; C6.2@601.81,1678.54 601.81,1726.81 v1@605,1730 ; C37.2@751.81,1495.35 751.81,1463.19 v1@780,1435 ; C35.2@751.81,1732.09 751.81,1771.81 v1@765,1785 ; v1@780,2790 785,2785 U8.1@891.81,2785 ; v1@835,1450 836.81,1451.81 C36.2@836.81,1501.38 ; C34.2@836.81,1725.79 836.81,1781.81 v1@840,1785 ; v1@850,1380 857.2,1387.2 MCU0.20@921.69,1387.2 ; v1@855,1610 865.1,1610 890.14,1584.96 920.79,1584.96 MCU0.10@921.69,1584.06 ; v1@865,1425 883.11,1406.89 MCU0.19@921.69,1406.89 ; MCU0.27@1010.28,1219.88 1010.28,1174.72 v1@1020,1165 ; MCU0.99@1010.28,1830.12 1010.28,1897.57 1020,1907.29 v1(1020,1910) ; C33.2@1091.81,2565 v1@1170,2565 ; v1@1425,1270 1442.44,1252.56 1442.44,1220.79 MCU0.49@1443.35,1219.88 ; MCU0.74@1531.93,1741.54 1532.84,1742.44 1557.44,1742.44 v1@1585,1770 ; v1@1840,2750 U1.1@1946.81,2750 ; C0.2@2221.81,2650 v1(2280,2650) ; v1@2280,1025 2285,1030 U4.2@2353.7,1030 ; v1@2365,2840 U2.2@2413.7,2840 ; U4.2@2589.92,1030 2660,1030 v1@2665,1025 ; v1@2625,1230 2639.29,1230 2681.81,1187.48 C7.2@2681.81,1186.5 ; U2.2@2649.92,2840 v1@2700,2840 ; v1@2650,2545 2651.81,2546.81 C2.2@2651.81,2603.5 ; C5.2@2654.8,855 2654.8,780.2 v1@2655,780 ; v1@2725,3040 2726.81,3038.19 C3.2@2726.81,2991.5 ; C1.2@2775,3430 v1@2818.54,3430 ; v1@2785,1320 2796.81,1308.19 C42.2@2796.81,1257.09 ; v1@2795,955 2796.81,956.81 C40.2@2796.81,1020.08 ; v1@2860,2770 2861.81,2771.81 C48.2@2861.81,2814.76 ; C45.2@2861.81,3051.77 2861.81,3106.81 v1@2865,3110 ; v1@2865,950 2876.81,961.81 C41.2@2876.81,1026.38 ; v1@2870,1320 2876.81,1313.19 C43.2@2876.81,1250.79 ; v1@2905,900 2917.2,912.2 MCU1.20@2971.69,912.2 ; v1@2920,955 2942.2,932.8 2970.79,932.8 MCU1.19@2971.69,931.89 ; v1@2920,1135 2945.04,1109.96 2970.79,1109.96 MCU1.10@2971.69,1109.06 ; C44.2@2941.81,3045.47 2941.81,3101.81 v1@2945,3105 ; v1@2945,2765 2946.81,2766.81 C47.2@2946.81,2821.06 ; v1@2955,2710 2958.11,2706.89 MCU2.20@3036.81,2706.89 ; v1@2980,2930 2986.57,2930 3009.05,2907.52 3009.65,2907.52 3012.52,2904.65 3035.91,2904.65 MCU2.10@3036.81,2903.74 ; v1@2985,2740 2998.43,2726.57 MCU2.19@3036.81,2726.57 ; v1(3045,1460) 3045,1457.29 3060.28,1442.02 MCU1.99@3060.28,1355.12 ; MCU1.27@3060.28,744.88 3060.28,702.08 3074.65,687.71 v1(3074.65,685) ; v1@3105,2450 3125.39,2470.39 MCU2.27@3125.39,2539.57 ; MCU2.99@3125.39,3149.8 3125.39,3185.39 v1@3155,3215 ; v1(3493.35,635) MCU1.49@3493.35,744.88 ; MCU2.49@3558.47,2539.57 3557.56,2538.66 3557.56,2506.4 3543.9,2492.73 3543.9,2451.1 3583.35,2411.65 v1@3583.35,2407.61 ; MCU1.74@3581.93,1266.54 3582.84,1267.44 3606.82,1267.44 3625,1285.62 v1(3625,1325) ; MCU2.74@3647.05,3061.22 3708.78,3061.22 v1@3710,3060 ; v1@4065,2340 4070,2335 R7.2@4117.44,2335 ; v1@4085,2565 4099.41,2565 4122.44,2541.97 R14.2@4122.44,2540 ; v1@4095,2780 R23.2@4137.13,2780 ; v1@4110,2420 4117.4,2412.6 Q7.2@4162.44,2412.6 ; v1@4115,2190 Q3.2@4156.81,2190 ; v1@4140,2650 4142.4,2647.6 Q11.2@4177.44,2647.6 ; v1@4150,2950 4152.6,2952.6 Q4.2@4197.44,2952.6 ; v1@4150,3195 4150.2,3195.2 Q8.2@4196.81,3195.2 ; v1@4165,3435 4167.6,3437.6 Q12.2@4202.44,3437.6 ; R8.2@4236.5,3080 v1@4290,3080 ; R16.2@4236.5,3325 v1@4275,3325 ; R24.2@4241.5,3570 4285,3570 v1@4290,3565 ; v1@4270,2340 4277.4,2340 4320.71,2296.69 C13.2@4326.81,2296.69 ; v1@4280,3395 4290.71,3405.71 C31.2@4351.81,3405.71 ; v1@4285,3155 4293.31,3163.31 C23.2@4346.81,3163.31 ; v1@4295,2890 4300.36,2890 4335.71,2925.35 C15.2@4341.81,2925.35 ; C20.2@4326.81,2519.29 4326.81,2566.81 v1@4330,2570 ; v1@4345,2805 4346.81,2803.19 C29.2@4346.81,2754.29 ; v1@4420,3115 4420,3145.47 4437.83,3163.31 C22.2@4441.81,3163.31 ; v1@4430,2345 4431.81,2343.19 C12.2@4431.81,2296.69 ; C28.2@4431.81,2754.29 4495.71,2754.29 v1@4500,2750 ; C14.2@4431.81,2925.35 4449.65,2907.52 4487.48,2907.52 v1@4495,2900 ; C21.2@4436.81,2519.29 4494.29,2519.29 v1@4495,2520 ; C30.2@4441.81,3405.71 4490.71,3405.71 v1@4495,3410 ; v1@4490,2650 4495,2655 R19.2@4531.81,2655 ; v1@4490,3120 4500,3130 R12.2@4527.13,3130 ; v1@4495,2420 4500,2425 R10.2@4532.44,2425 ; v1@4520,2095 Q1.2@4571.81,2095 ; v1@4525,2320 4542.4,2302.6 Q5.2@4572.44,2302.6 ; v1@4530,3005 4532.4,3002.6 Q6.2@4567.44,3002.6 ; v1@4530,3250 4532.4,3247.6 Q10.2@4573.07,3247.6 ; Q2.2@4567.44,2772.6 4567.44,2737.56 v1@4575,2730 ; Q9.2@4573.07,2527.6 4579.21,2521.46 4579.21,2500.79 v1@4590,2490 ; R4.2@4606.5,2900 4645,2900 v1(4675,2870) ; R20.2@4606.5,3380 v1@4650,3380 ; R3.2@4611.5,2220 v1@4645,2220 ; v1@4650,3205 4711.46,3205 C27.2@4721.81,3215.35 ; v1@4660,2420 4670.71,2409.29 C16.2@4716.81,2409.29 ; v1@4670,2645 4680.71,2634.29 C24.2@4726.81,2634.29 ; v1@4685,2730 4695.71,2740.71 C11.2@4736.81,2740.71 ; v1(4710,2240) 4710,2206.46 C8.2@4716.81,2199.65 ; C18.2@4721.81,2970.71 4721.81,2928.19 v1@4725,2925 ; C9.2@4801.81,2199.65 4864.65,2199.65 v1@4875,2210 ; C19.2@4801.81,2970.71 4801.81,2923.19 v1@4805,2920 ; C26.2@4806.81,3215.35 4869.65,3215.35 v1@4870,3215 ; C17.2@4811.81,2409.29 4859.29,2409.29 v1@4870,2420 ; C25.2@4811.81,2634.29 4874.29,2634.29 v1@4880,2640 ; C10.2@4826.81,2740.71 4884.29,2740.71 v1@4885,2740
  other v1: 390,130 520,130 650,130 780,130 910,130 1040,130 1170,130 1300,130 1430,130 1560,130 1690,130 1820,130 1950,130 2080,130 2210,130 2340,130 2470,130 2600,130 2730,130 2860,130 2990,130 3120,130 3250,130 3380,130 3510,130 3640,130 3770,130 3900,130 4030,130 4160,130 4290,130 4420,130 4550,130 4680,130 4810,130 4940,130 5330,130 455,260 585,260 715,260 845,260 975,260 1105,260 1235,260 1365,260 1495,260 1625,260 1755,260 1885,260 2015,260 2145,260 2275,260 2405,260 2535,260 2665,260 2925,260 3055,260 3185,260 3315,260 3445,260 3575,260 3705,260 4225,260 4355,260 4485,260 4615,260 4745,260 4875,260 5395,260 130,390 390,390 520,390 650,390 780,390 910,390 1040,390 1170,390 1300,390 1430,390 1560,390 1690,390 1820,390 1950,390 2080,390 2210,390 2340,390 2470,390 2600,390 2730,390 2860,390 3120,390 3770,390 4160,390 4290,390 4420,390 4550,390 4680,390 4810,390 4940,390 5330,390 195,520 325,520 455,520 585,520 715,520 845,520 975,520 1105,520 1235,520 1365,520 1495,520 1625,520 1755,520 1885,520 2015,520 2145,520 2275,520 2405,520 2535,520 2665,520 2795,520 3575,520 3705,520 4095,520 4355,520 4485,520 4615,520 4745,520 4875,520 5005,520 5135,520 5265,520 5395,520 130,650 260,650 390,650 520,650 650,650 780,650 910,650 1040,650 1170,650 1300,650 2470,650 2600,650 2730,650 2860,650 4030,650 4160,650 4290,650 4420,650 4550,650 4680,650 4810,650 4940,650 5070,650 5200,650 5330,650 195,780 325,780 455,780 585,780 845,780 975,780 1105,780 1235,780 1365,780 1495,780 1625,780 1755,780 2015,780 2275,780 2535,780 2795,780 3835,780 4355,780 4485,780 4615,780 4745,780 4875,780 5005,780 5135,780 5265,780 5395,780 2656.79,781.37 2906.79,901.37 130,910 260,910 390,910 520,910 650,910 780,910 1040,910 1300,910 1430,910 1560,910 1690,910 2210,910 2340,910 2470,910 2730,910 2860,910 3120,910 3250,910 4030,910 4160,910 4290,910 4420,910 4550,910 4680,910 4810,910 4940,910 5070,910 5200,910 5330,910 2866.79,951.37 2796.79,956.37 2921.79,956.37 2281.79,1026.37 2666.79,1026.37 195,1040 325,1040 455,1040 585,1040 2015,1040 2405,1040 2535,1040 2925,1040 3315,1040 3445,1040 4355,1040 4485,1040 4615,1040 4745,1040 4875,1040 5005,1040 5135,1040 5265,1040 5395,1040 2921.79,1136.37 1021.79,1166.37 130,1170 260,1170 390,1170 520,1170 650,1170 780,1170 2210,1170 2340,1170 2470,1170 2600,1170 3250,1170 4160,1170 4290,1170 4420,1170 4550,1170 4680,1170 4810,1170 4940,1170 5070,1170 5200,1170 5330,1170 2626.79,1231.37 1426.79,1271.37 195,1300 325,1300 455,1300 2275,1300 2405,1300 2535,1300 2665,1300 2925,1300 4355,1300 4485,1300 4615,1300 4745,1300 4875,1300 5005,1300 5135,1300 5265,1300 5395,1300 2606,1303 2786.79,1321.37 2871.79,1321.37 626.79,1351.37 851.79,1381.37 866.79,1426.37 130,1430 260,1430 390,1430 650,1430 1040,1430 1170,1430 1300,1430 2210,1430 2340,1430 2470,1430 2600,1430 2730,1430 2860,1430 2990,1430 3380,1430 3770,1430 4030,1430 4160,1430 4290,1430 4420,1430 4550,1430 4680,1430 4810,1430 4940,1430 5070,1430 5200,1430 5330,1430 781.79,1436.37 836.79,1451.37 236.79,1521.37 561.79,1526.37 195,1560 455,1560 585,1560 1105,1560 1235,1560 2275,1560 2405,1560 2535,1560 2665,1560 2795,1560 2925,1560 3445,1560 3575,1560 3705,1560 3835,1560 4225,1560 4355,1560 4485,1560 4615,1560 4745,1560 4875,1560 5005,1560 5135,1560 5265,1560 5395,1560 856.79,1611.37 130,1690 260,1690 390,1690 520,1690 1040,1690 1170,1690 1300,1690 2080,1690 2210,1690 2340,1690 2470,1690 2600,1690 2730,1690 2860,1690 2990,1690 3250,1690 3640,1690 3770,1690 3900,1690 4030,1690 4160,1690 4290,1690 4420,1690 4550,1690 4680,1690 4810,1690 4940,1690 5070,1690 5200,1690 5330,1690 606.79,1731.37 1586.79,1771.37 766.79,1786.37 841.79,1786.37 195,1820 325,1820 455,1820 585,1820 845,1820 1495,1820 2015,1820 2145,1820 2275,1820 2405,1820 2535,1820 2665,1820 2795,1820 2925,1820 3055,1820 3185,1820 3445,1820 3575,1820 3705,1820 3835,1820 3965,1820 4095,1820 4225,1820 4355,1820 4485,1820 4615,1820 4745,1820 4875,1820 5005,1820 5135,1820 5265,1820 5395,1820 130,1950 260,1950 390,1950 520,1950 650,1950 780,1950 910,1950 1690,1950 2210,1950 2340,1950 2470,1950 2600,1950 2860,1950 2990,1950 3250,1950 3380,1950 3510,1950 3640,1950 3770,1950 3900,1950 4030,1950 4160,1950 4290,1950 4420,1950 4550,1950 4680,1950 4810,1950 4940,1950 5070,1950 5200,1950 5330,1950 195,2080 325,2080 455,2080 585,2080 845,2080 975,2080 1495,2080 1625,2080 1755,2080 1885,2080 2145,2080 2275,2080 2405,2080 2665,2080 2795,2080 2925,2080 3055,2080 3185,2080 3315,2080 3445,2080 3575,2080 3705,2080 3835,2080 3965,2080 4095,2080 4225,2080 4355,2080 4485,2080 4615,2080 4745,2080 4875,2080 5005,2080 5135,2080 5265,2080 5395,2080 4521.79,2096.37 4116.79,2191.37 130,2210 260,2210 390,2210 520,2210 650,2210 780,2210 1170,2210 1560,2210 1690,2210 1820,2210 2080,2210 2210,2210 2340,2210 2600,2210 2860,2210 2990,2210 3770,2210 3900,2210 4030,2210 4940,2210 5070,2210 5200,2210 5330,2210 4876.79,2211.37 4646.79,2221.37 4526.79,2321.37 195,2340 325,2340 455,2340 585,2340 845,2340 1495,2340 1625,2340 1755,2340 1885,2340 2015,2340 2145,2340 2275,2340 2405,2340 2535,2340 2665,2340 2795,2340 3835,2340 4225,2340 4355,2340 4485,2340 4615,2340 5005,2340 5395,2340 4066.79,2341.37 4271.79,2341.37 4431.79,2346.37 3586.79,2406.37 4111.79,2421.37 4496.79,2421.37 4661.79,2421.37 4871.79,2421.37 3106.79,2451.37 130,2470 260,2470 390,2470 520,2470 650,2470 780,2470 910,2470 1040,2470 2210,2470 2340,2470 2470,2470 2600,2470 2730,2470 2990,2470 3770,2470 4940,2470 5330,2470 4591.79,2491.37 4496.79,2521.37 2651.79,2546.37 1171.79,2566.37 4086.79,2566.37 4331.79,2571.37 2535,2600 2795,2600 4615,2600 4875,2600 5395,2600 4881.79,2641.37 4671.79,2646.37 4141.79,2651.37 4491.79,2651.37 2956.79,2711.37 130,2730 260,2730 1170,2730 1300,2730 1430,2730 1560,2730 1690,2730 1820,2730 2210,2730 2340,2730 2470,2730 2600,2730 2730,2730 3380,2730 3510,2730 4290,2730 4550,2730 4940,2730 5330,2730 4576.79,2731.37 4686.79,2731.37 2986.79,2741.37 4886.79,2741.37 1841.79,2751.37 4501.79,2751.37 2946.79,2766.37 2861.79,2771.37 4096.79,2781.37 781.79,2786.37 4346.79,2806.37 2366.79,2841.37 2701.79,2841.37 195,2860 325,2860 455,2860 585,2860 715,2860 845,2860 1105,2860 1235,2860 1365,2860 1495,2860 1625,2860 1755,2860 1885,2860 2145,2860 2275,2860 2535,2860 3185,2860 3315,2860 4615,2860 5265,2860 5395,2860 4296.79,2891.37 4496.79,2901.37 4806.79,2921.37 4726.79,2926.37 2981.79,2931.37 4151.79,2951.37 130,2990 260,2990 390,2990 520,2990 650,2990 780,2990 910,2990 1040,2990 1170,2990 1300,2990 1430,2990 1560,2990 1690,2990 1820,2990 1950,2990 2210,2990 2340,2990 2470,2990 2600,2990 3250,2990 3380,2990 3510,2990 3770,2990 4160,2990 5330,2990 4531.12,3005 2726.79,3041.37 3711.79,3061.37 4291.79,3081.37 2946.79,3106.37 2866.79,3111.37 4421.79,3116.37 195,3120 325,3120 455,3120 585,3120 715,3120 1235,3120 1365,3120 1495,3120 1625,3120 1755,3120 2275,3120 2405,3120 2665,3120 2795,3120 2925,3120 3055,3120 3705,3120 3835,3120 4615,3120 4745,3120 4875,3120 5005,3120 5135,3120 5265,3120 5395,3120 4491.79,3121.37 4286.79,3156.37 4151.79,3196.37 4651.79,3206.37 3156.79,3216.37 4871.79,3216.37 130,3250 260,3250 390,3250 520,3250 650,3250 1300,3250 1430,3250 1560,3250 1690,3250 1820,3250 2730,3250 2860,3250 2990,3250 3380,3250 3510,3250 3640,3250 3770,3250 3900,3250 5200,3250 5330,3250 4531.79,3251.37 4276.79,3326.37 195,3380 325,3380 455,3380 585,3380 715,3380 1495,3380 1625,3380 1755,3380 2795,3380 2925,3380 3055,3380 3185,3380 3315,3380 3445,3380 3575,3380 3705,3380 3835,3380 3965,3380 4745,3380 4875,3380 5005,3380 5135,3380 5265,3380 5395,3380 4656.79,3381.37 4281.79,3396.37 4496.79,3411.37 2825.33,3431.37 4166.79,3436.37 1950,3510 2860,3510 2990,3510 3120,3510 3250,3510 3380,3510 3510,3510 3640,3510 3770,3510 3900,3510 4030,3510 4290,3510 4550,3510 4680,3510 4810,3510 4940,3510 5330,3510 4291.79,3566.37 455,3640 2015,3640 2145,3640 2275,3640 2405,3640 2535,3640 2665,3640 2795,3640 2925,3640 3055,3640 3185,3640 3315,3640 3445,3640 3575,3640 3705,3640 3835,3640 3965,3640 4095,3640 4225,3640 4355,3640 4485,3640 4615,3640 4745,3640 4875,3640 5395,3640 130,3770 390,3770 520,3770 650,3770 780,3770 910,3770 1040,3770 1170,3770 1300,3770 1430,3770 1560,3770 1690,3770 1820,3770 1950,3770 2080,3770 2210,3770 2340,3770 2470,3770 2600,3770 2730,3770 2860,3770 2990,3770 3120,3770 3250,3770 3380,3770 3510,3770 3640,3770 3770,3770 3900,3770 4030,3770 4160,3770 4290,3770 4420,3770 4550,3770 4680,3770 4810,3770 4940,3770 5330,3770
Mos0_out: C8.1 C9.1 Q1.3 X4.P$7 | length 768.5
  Top Layer w10: Q1.3@4650.55,2132.4 4714.76,2132.4 C8.1@4716.81,2130.35 C9.1@4801.81,2130.35 4952.17,2130.35 5214.92,2393.11 X4.P$7@5214.92,2487.55
Mos1_out: C12.1 C13.1 Q3.3 X4.P$1 | length 971
  Top Layer w10: Q3.3@4235.55,2227.4 4237.95,2225 4326.81,2225 4431.81,2225 4496.81,2225 4536.81,2265 4874.26,2265 X4.P$1@5096.81,2487.55
Mos2_out: C16.1 C17.1 Q5.3 X4.P$8 | length 673.8
  Top Layer w10: Q5.3@4651.18,2340 C16.1@4716.81,2340 C17.1@4811.81,2340 4846.81,2340 5046.81,2540 5149.26,2540 X4.P$8@5214.92,2605.66
Mos3_out: C20.1 C21.1 Q7.3 X4.P$2 | length 920.1
  Top Layer w10: Q7.3@4241.18,2450 C20.1@4326.81,2450 C21.1@4436.81,2450 4876.81,2450 5032.47,2605.66 X4.P$2@5096.81,2605.66
Mos4_out: C24.1 C25.1 Q9.3 X4.P$9 | length 635.1
  Top Layer w10: Q9.3@4651.81,2565 C24.1@4726.81,2565 C25.1@4811.81,2565 4946.81,2565 5051.81,2670 5171.81,2670 5214.92,2713.11 X4.P$9@5214.92,2723.77
Mos5_out: C28.1 C29.1 Q11.3 X4.P$3 | length 856.7
  Top Layer w10: Q11.3@4256.18,2685 C29.1@4346.81,2685 C28.1@4431.81,2685 4936.81,2685 4975.58,2723.77 X4.P$3@5096.81,2723.77
Mos6_out: C10.1 C11.1 Q2.3 X4.P$10 | length 602.7
  Top Layer w10: Q2.3@4646.18,2810 C11.1@4736.81,2810 C10.1@4826.81,2810 4971.81,2810 4996.81,2785 5158.03,2785 X4.P$10@5214.92,2841.89
Mos7_out: C14.1 C15.1 Q4.3 X4.P$4 | length 885.8
  Top Layer w10: Q4.3@4276.18,2990 4427.17,2990 C14.1@4431.81,2994.65 4437.91,2994.65 4497.56,2935 4646.81,2935 4738.98,2842.83 5095.87,2842.83 X4.P$4@5096.81,2841.89
Mos8_out: C18.1 C19.1 Q6.3 X4.P$11 | length 647.4
  Top Layer w10: Q6.3@4646.18,3040 C18.1@4721.81,3040 C19.1@4801.81,3040 4901.81,3040 5036.81,2905 5159.92,2905 X4.P$11@5214.92,2960
Mos9_out: C22.1 C23.1 Q8.3 X4.P$5 | length 934.2
  Top Layer w10: Q8.3@4275.55,3232.6 C23.1@4346.81,3232.6 C22.1@4441.81,3232.6 4447.91,3232.6 4503.13,3177.38 4879.43,3177.38 X4.P$5@5096.81,2960
Mos10_out: C26.1 C27.1 Q10.3 X4.P$6 | length 530.7
  Top Layer w10: Q10.3@4651.81,3285 4889.92,3285 X4.P$6@5096.81,3078.11
Mos11_out: C30.1 C31.1 Q12.3 X4.P$12 | length 1098.1
  Top Layer w10: Q12.3@4281.18,3475 C31.1@4351.81,3475 C30.1@4441.81,3475 4818.03,3475 X4.P$12@5214.92,3078.11
NetMCU0_23: MCU0.23 X9.P$1 | length 463.4
  Top Layer w10: v1(836.81,1310) 854.96,1328.15 MCU0.23@921.69,1328.15
  Fouth Layer w10: v1(836.81,1310) 836.81,1061.89 X9.P$1@923.7,975
NetMCU0_24: MCU0.24 X9.P$2 | length 438.6
  Top Layer w10: v1(871.81,1270) 873.73,1271.91 873.73,1284.48 896.8,1307.56 920.79,1307.56 MCU0.24@921.69,1308.46
  Fouth Layer w10: v1(871.81,1270) 871.81,1145 X9.P$2@1041.81,975
NetMCU0_25: MCU0.25 X9.P$3 | length 437.9
  Top Layer w10: MCU0.25@921.69,1288.78 921.81,1288.66 v1(921.81,1220)
  Fouth Layer w10: v1(921.81,1220) 921.81,1169.64 1114.8,976.65 1158.27,976.65 X9.P$3@1159.92,975
NetMCU0_26: MCU0.26 X9.P$4 | length 437.9
  Top Layer w10: MCU0.26@990.59,1219.88 990.59,1138.93 996.81,1132.71 v1(996.81,1130)
  Fouth Layer w10: v1(996.81,1130) 1031.81,1095 1131.81,1095 1243.02,983.79 1269.25,983.79 X9.P$4@1278.04,975